# Altium PCB mach_xa_pin_pcb.PcbDoc
Units mil, origin at the board's own origin, x right, y up, seen from the top; angles counter-clockwise.
Board outline 1574.8 x 590.55 mil, 2 copper layers (Top Layer, Bottom Layer); 30 components, 22 nets, 94 pads, 39 vias.
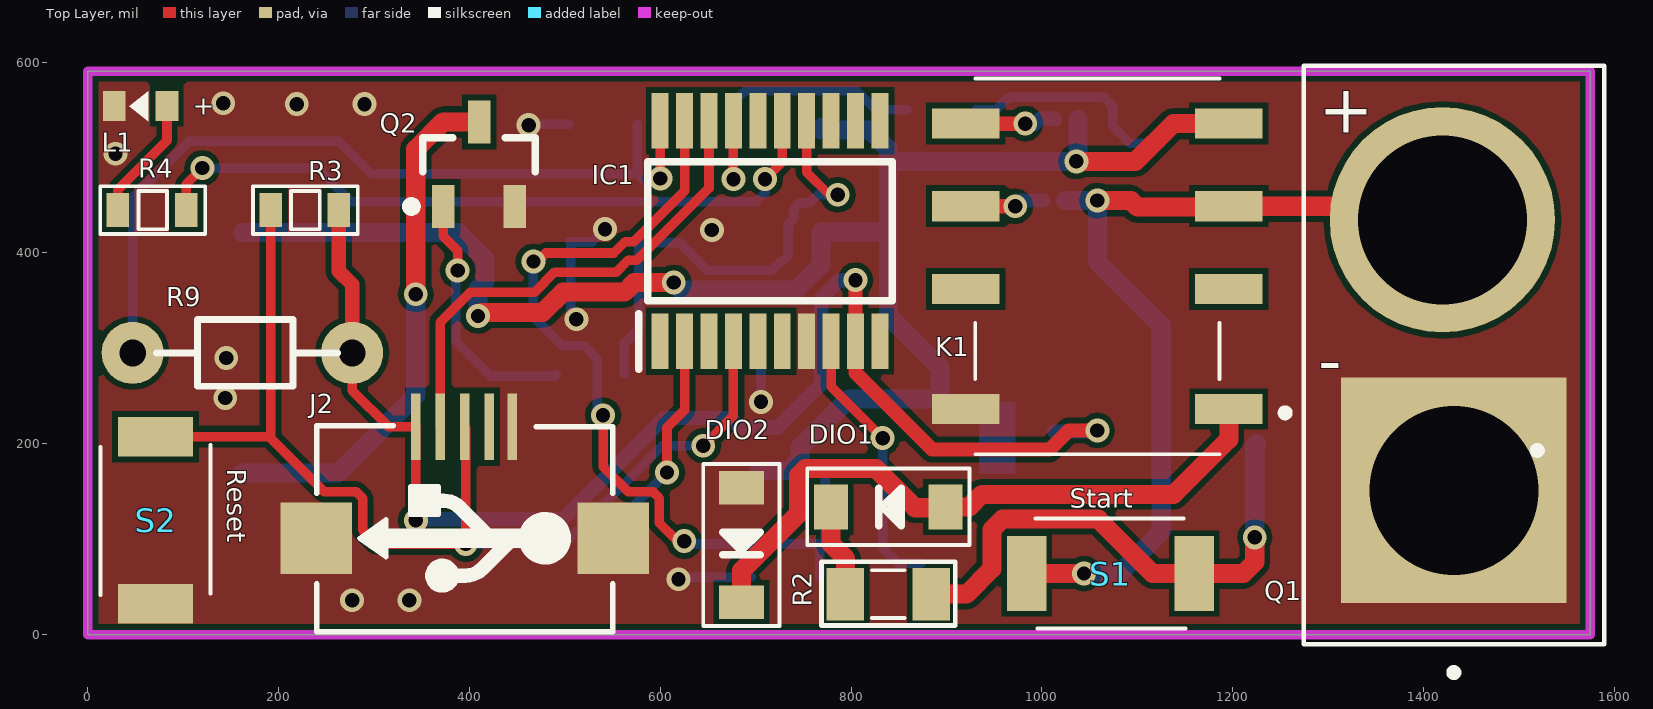
[diagram p0: Top Layer view]
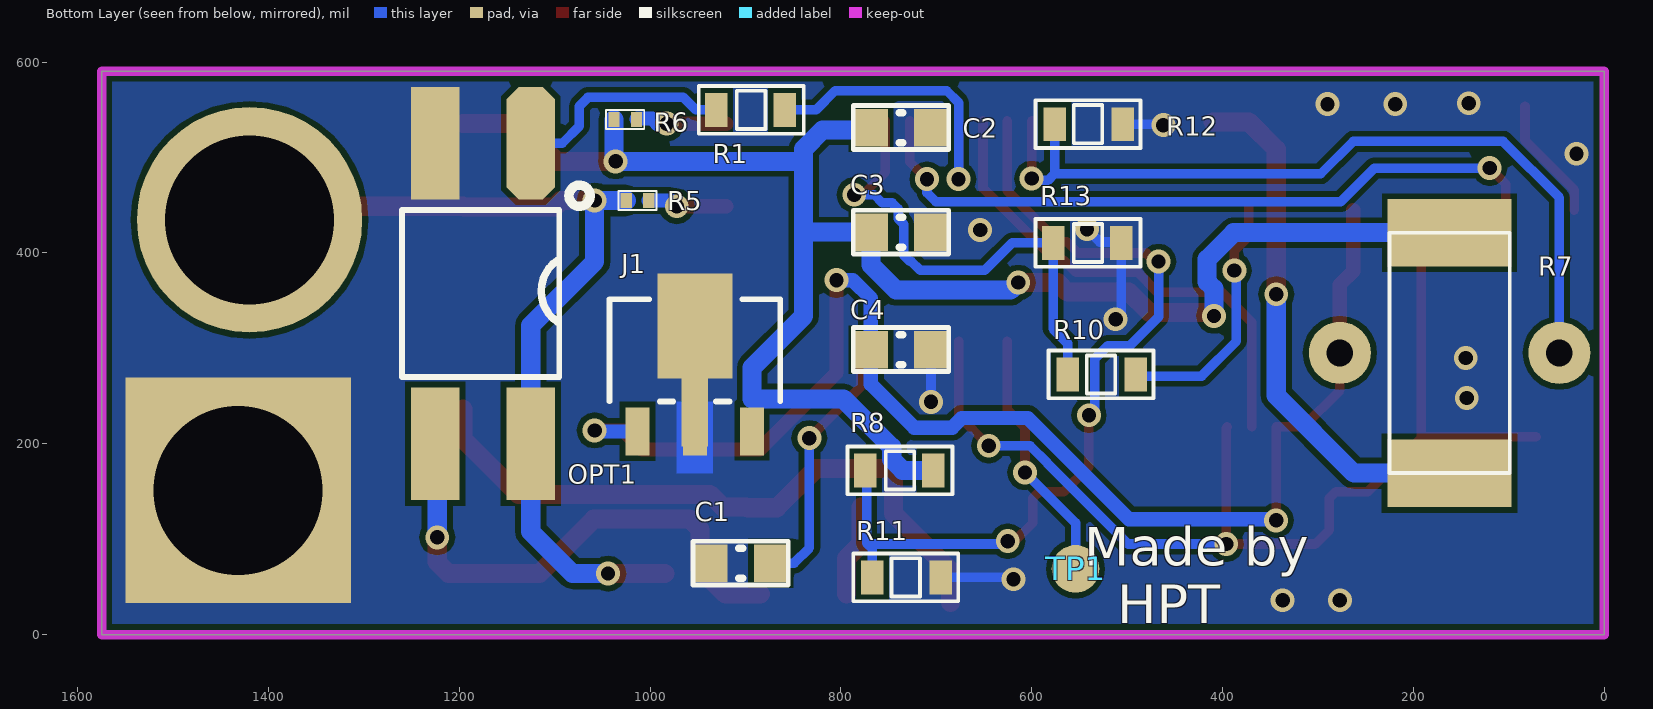
[diagram p1: Bottom Layer view, seen from below]

## Layer stack, top to bottom
Top Solder: solder mask 0.4, Solder Resist, Dk 3.5
Top Layer: signal copper 1.4
Dielectric 1: dielectric 12.6, FR-4, Dk 4.8
Bottom Layer: signal copper 1.4
Bottom Solder: solder mask 0.4, Solder Resist, Dk 3.5

## Board outline
0,0 0,590.55 1574.8,590.55 1574.8,0

## Design rules (kind name [scope] priority, off if disabled: settings)
Clearance [All] p1: gap=6
HoleToHoleClearance [All] p1: gap=6 allowstackedmicrovias=TRUE
MinimumSolderMaskSliver [All] p1: minsoldermaskwidth=6
PlaneConnect [All] p1: planeconnectstyle=Direct reliefexpansion=20 reliefentries=4 reliefconductorwidth=10 reliefairgap=0
PolygonConnect [All] p1: connectstyle=Direct reliefconductorwidth=10 reliefentries=4 polygonreliefangle="90 Angle" airgapwidth=10
RoomDefinition mach_xa_pin_schematic [InComponentClass('mach_xa_pin_schematic')] p1: confinementstyle=ConfineIn formatcopy=TRUE lockcomponents=FALSE outline 2217.7,12.1 2947.7,12.1 2947.7,382.1 2217.7,382.1
RoutingVias [All] p1: holewidth=15 width=25 viastyle="Through Hole" minholewidth=15 minwidth=25 maxholewidth=25 maxwidth=50
SilkToSilkClearance [All] p1: silktosilkclearance=6
SilkToSolderMaskClearance [IsPad] p1: minsilkscreentomaskgap=6 clearancetoexposedcopper=TRUE
SolderMaskExpansion [All] p1: expansion=4
Width [All] p1: maxlimit=50 minlimit=6 preferedwidth=10
25 further rules are at their usual default settings.

## Components (designator, comment, footprint, x,y, rotation, side; value= is the part's Value field where it differs from the comment)
C1 "1uF" CN-SMD-0603 905,75 r0 bottom
C2 "10pF" CN-SMD-0603 737,531.46 r0 bottom
C3 "10pF" CN-SMD-0603 737,421.89 r0 bottom
C4 "10pF" CN-SMD-0603 737,298.77 r0 bottom
DIO1 "Diode SMD" DIO-SMD-123 839,134 r0 top
DIO2 "Diode SMD" DIO-SMD-123 685,94 r90 top
IC1 "STM8S103F3P6BTR" SOP65P640X120-20N 715,423 r90 top
J1 "78L05" SOT89R 953,288 r180 bottom
J2 "USB-5" USB-M1 395,218 r180 top
K1 "G6K-2F-Y-DC12" G6K2FYDC12 1058,386 r90 top
L1 "Led 0603 Green" "LED 0603 GREEN" 55.4,554 r180 top
OPT1 "PC817" "DIP-4 SMD" 1125,515 r270 bottom
Q1 "XT60_YELLOW" AMASS_XT60PB-M 1431.7,293 r90 top
Q2 "AO3400" SOT-23_N 410,493 r90 top
R1 "220R" RES-SMD-0603 894,550 r0 bottom
R2 "0R" RES-SMD-0805 839,42.5 r180 top
R3 "1K" RES-SMD-0603 228,445 r180 top
R4 "220R" RES-SMD-0603 68,445 r180 top
R5 "0R" RES-SMD-0201 1013,455 r180 bottom
R6 "0R" RES-SMD-0201 1026,540 r0 bottom
R7 "181R" RES-SMD-2512 167,295.28 r270 bottom
R8 "10K" RES-SMD-0603 737.99,172.11 r0 bottom
R9 "Res" RES-1/8W-SMALL-2 167,300.28 r180 top
R10 "1K" RES-SMD-0603 527.32,272.68 r180 bottom
R11 "1K" RES-SMD-0603 732,60 r180 bottom
R12 "10K" RES-SMD-0603 540.99,535 r180 bottom
R13 "10K" RES-SMD-0603 541,410.5 r0 bottom
S1 "Start" TS1088R02026 1071.78,64 r180 top
S2 "Reset" TS1088R02026 71,120 r90 top
TP1 "TP" "P-TP 1MM" 554,69 r90 bottom

## Footprints (in the part's own frame and the unit in brackets; to place one, negate y for a bottom-side part, rotate by r counter-clockwise, add the part's x,y. Pads: shape width x height; smd on the part's side, far side on the other; paste and mask are expansions set on the pad)
AMASS_XT60PB-M [mm]
  rect 6x6 hole 4.5: 1(-3.6,0)
  round 6 hole 4.5: 2(3.6,0.305)
  silkscreen extent -8.55,-4 7.7,4, body extent -7.75,-19.65 7.75,0.85, height 6.08
CN-SMD-0603 [mm]
  rect 0.9x1 smd: 1(-0.8,0) 2(0.8,0)
  silkscreen extent -1.27,-0.58 1.27,0.58, body extent -0.8,-0.4 0.8,0.4, height 0.3
DIO-SMD-123 [mm]
  rect 0.9x1.2 smd: 1(1.524,0) 2(-1.524,0)
  silkscreen extent -2.16,-1.02 2.16,1.02, body extent -1.76,-0.8 1.94,0.8, height 1.25
"DIP-4 SMD" [mm]
  oct 3x1.3 smd: 1(0,0)
  rect 3x1.3 smd: 2(0,-2.54) 3(8,-2.54) 4(8,0)
  silkscreen extent 1.11,-3.43 6.22,1.58, body extent -1,-3.56 9,1.02, height 3.75
G6K2FYDC12 [mm]
  rect 0.8x1.8 smd: 1(-3.8,-3.5) 2(-0.6,-3.5) 3(1.6,-3.5) 4(3.8,-3.5) 5(3.8,3.5) 6(1.6,3.5) 7(-0.6,3.5) 8(-3.8,3.5)
  silkscreen extent -5,-5.1 5,3.25, body extent -5,-4.32 5,4.32, height 5.5
"LED 0603 GREEN" [mm]
  rect 0.6x0.8 smd: 1(-0.7,0) 2(0.7,0)
  silkscreen extent -0.2,-0.4 0.3,0.4, body extent -0.8,-0.4 0.8,0.4, height 0.62
"P-TP 1MM" [mil]
  round 50 smd mask+2: 1(0,0)
RES-1/8W-SMALL-2 [mil] "R 1/8W, 2 pin, 200mil"
  round 65 hole 28: 1(-110,5) 2(120,5)
  silkscreen extent -95,-30 95,40, body extent -121,-30 131,41, height 75
RES-SMD-0201 [mm]
  rect 0.3x0.4 smd: 1(-0.3,0) 2(0.3,0)
  silkscreen extent -0.51,-0.25 0.51,0.25, body extent -0.3,-0.15 0.3,0.15, height 0.22
RES-SMD-0603 [mm]
  rect 0.6x0.9 smd: 1(-0.889,0) 2(0.927,0)
  silkscreen extent -1.4,-0.64 1.4,0.64, body extent -0.8,-0.4 0.8,0.4, height 0.43
RES-SMD-0805 [mil]
  rect 39.37x55 smd: 1(-45,0) 2(45,0)
  silkscreen extent -70,-34 70,33, body extent -39,-25 39,25, height 31
RES-SMD-2512 [mm] "Chip Capacitor, Body 3.2x2.5mm, IPC Medium Density"
  rect 1.8x3.3 smd: 1(-3.2,0.127) 2(3.2,0.127)
  silkscreen extent -3.2,-1.47 3.2,1.73, body extent -3.2,-1.47 3.2,1.73, height 0.6
SOP65P640X120-20N [mm]
  rect 1.475x0.45 smd: 1(-2.938,2.925) 2(-2.938,2.275) 3(-2.938,1.625) 4(-2.938,0.975) 5(-2.938,0.325) 6(-2.938,-0.325) 7(-2.938,-0.975) 8(-2.938,-1.625) 9(-2.938,-2.275) 10(-2.938,-2.925) 11(2.938,-2.925) 12(2.938,-2.275) 13(2.938,-1.625) 14(2.938,-0.975) 15(2.938,-0.325) 16(2.938,0.325) 17(2.938,0.975) 18(2.938,1.625) 19(2.938,2.275) 20(2.938,2.925)
  silkscreen extent -3.67,-3.25 1.85,3.5, body extent -3.2,-3.25 3.2,3.25, height 1.2
SOT89R [mm]
  rect 0.635x1.27 smd: P$1(1.524,-1.905) P$2(0,-1.905) P$3(-1.524,-1.905)
  rect 0.7x1.8 smd paste-2 mask+0: P$2(0,-1.4)
  rect 2x2.8 smd: P$2(0,0.9)
  Top Layer region: 0.476,-3.016 -0.476,-3.016 -0.476,-1.111 0.476,-1.111
  silkscreen extent -2.27,-1.11 2.27,1.61, body extent -2.25,-2.43 2.25,1.67, height 1.6
SOT-23_N [mm] "SOT23, 3-Leads, Body 2.9x1.3mm, Pitch 0.95mm, Lead Span 2.3mm, IPC Medium Density"
  rect 1.15x0.6 smd: 1(-1.125,0.95) 2(-1.125,-0.95) 3(1.125,0)
  silkscreen extent -1.25,-1.5 0.7,1.92, body extent -0.7,-1.5 0.7,1.5, height 1.11
TS1088R02026 [mm]
  rect 1.05x2 smd: 1(-2.225,0) 2(2.225,0)
  silkscreen extent -2,-1.47 2,1.47, body extent -2.65,-1.47 2.65,1.47, height 2.3
USB-M1 [mil]
  rect 10x70 smd: 1(51.18,0) 2(25.59,0) 3(0,0) 4(-25.59,0) 5(-50,0)
  rect 74.8x74.8 smd: 5(-155.51,116.84) 5(155.51,116.84)
  silkscreen extent -155,-1 155,215, body extent -157,5 158,218, height 107

## Part data
C1 C2 C3 C4: library part CN
DIO1 DIO2: "Default Diode"
IC1: "Integrated Circuit"
J1: "IC REG LINEAR 5V 100MA SOT89-3"
K1: "Relay or Contactor"
OPT1: "OptoAcoplador 4 terminais"
Q1: "Power connector; 65A; PIN: 2; Colour: yellow"
Q2: library part IRLML2402, "HEXFET Power MOSFET"
R1 R2 R3 R4 R5 R6 R7 R8 R10 R11 R12 R13: library part Res-SMD, "Resistor"
S1 S2: library part TS-1088R-02026, "Switch"
TP1: library part P-TESTPOINT

## Via types
v1: diameter 25, hole 15, Top Layer to Bottom Layer, tented both sides, 39 vias

## Nets (pads, with @x,y where several pads share a name; then routed paths per layer and width w, separated by ;. In a path a pad name is that pad's centre, name@x,y a point inside that pad or via, vN(x,y) a via of type N, cw(c..) or ccw(c..) an arc to the next point about the centre after c; other vN are vias at no path point)
5V: C4.2 IC1.9 J1.P$3 J2.1 R3.1 R9.1 | length 1439.1
  Top Layer w10: R9.1 277,256 315,218 J2.1 v1(343.82,119.82)
  Top Layer w15: R3.1 263,381 277,367 R9.1 ; v1(804.57,371.57) IC1.9 804.57,274.43 885,194 1008,194 1028,214 v1(1058,214)
  Bottom Layer w15: v1(343.82,119.82) 345,121 498,121 604,227 673.23,227 683.23,217 723,217 768.5,262.5 C4.2 768.5,352.5 787.57,371.57 v1(804.57,371.57) ; J1.P$3 1057,213 v1(1058,214)
GND: C1.2 C2.1 C3.1 C4.1 DIO2.1 IC1.7 J1.P$2 J2.5 K1.8 L1.2 OPT1.2 Q1.1 Q2.2 R11.2 R12.2 R13.1 S2.1 | length 317.4
  Top Layer w10: v1@218,557 v1(219,556) ; v1(512,330.5) v1@512,331 ; v1@619,51 v1(619,58) ; v1(654,424) v1@654,430
  Bottom Layer w10: v1(144,248) v1@144,249 ; v1(462,534) 463,535 R12.2 ; v1(512,330.5) 506,336.5 R13.1 505,411.5 528.5,411.5 v1(542,425) ; v1(619,58) 621,60 R11.2 ; v1(705.5,244) C4.1
  other v1: 277,36 337,36 145,290 29,504 290,556 142,557
MOSFET: IC1.14 R10.1 R13.2 | length 518.7
  Top Layer w10: IC1.14 753.39,484.61 777,461 v1(786,461)
  Bottom Layer w10: R10.1 562.32,305.32 577.49,320.49 R13.2 620.5,410.5 649,382 717,382 726.2,391.2 727.78,391.2 734.22,397.64 734.22,430.22 739.78,435.78 739.78,446.13 746.22,452.57 756.57,452.57 765,461 v1(786,461)
NetC1_1: C1.1 IC1.8 | length 285.8
  Top Layer w10: IC1.8 778.98,260.02 v1(833,206)
  Bottom Layer w10: v1(833,206) 833,91 849,75 C1.1
NetDIO1_1: DIO1.1 DIO2.2 K1.1 | length 689.9
  Top Layer w20: DIO2.2 685,67 745,127 745,167 752,174 826,174 867,133 898,133 DIO1.1 924,134 937,147 1138,147 1195.8,204.8 K1.1
NetDIO1_2: DIO1.2 R2.2 | length 97.7
  Top Layer w20: DIO1.2 779,95 794,80 R2.2
NetIC1_2: IC1.2 TP1.1 | length 267.9
  Top Layer w10: v1(607,170) 607,217 625.43,235.43 IC1.2
  Bottom Layer w10: TP1.1 554,117 v1(607,170)
NetIC1_15: IC1.15 R4.1 | length 742.2
  Top Layer w10: R4.1 103,472 v1(120,489) ; v1(709.69,477.39) 727.8,495.49 IC1.15
  Bottom Layer w10: v1(120,489) 240.77,489 275.89,453.89 700.48,453.89 709.69,463.1 v1(709.69,477.39)
NetK1_5: K1.5 R6.1 | length 96.6
  Top Layer w15: K1.5 v1(982.39,535.61)
  Bottom Layer w15: v1(982.39,535.61) 992.61,535.61 998,541 1013.19,541 R6.1
NetK1_6: K1.6 R5.2 | length 83.5
  Top Layer w15: K1.6 v1(971.99,448.99)
  Bottom Layer w15: v1(971.99,448.99) 978,455 R5.2
NetL1_1: L1.1 R4.2 | length 130.3
  Top Layer w10: R4.2 31.51,466.51 82.96,517.96 L1.1
NetOPT1_1: OPT1.1 R1.2 | length 232.1
  Bottom Layer w10: R1.2 952,550 965,563 1065,563 1074,554 1074,533 1092,515 OPT1.1
NetOPT1_3: OPT1.3 R2.1 S1.1 | length 549
  Top Layer w20: R2.1 921.01,42.5 947.51,69 947.51,110 958.51,121 1059,121 1116,64 S1.1 1211,64 1223,76 v1(1223,102)
  Bottom Layer w20: v1(1223,102) 1223,198.04 OPT1.3
NetQ2_1: Q2.1 R10.2 | length 269.4
  Top Layer w10: Q2.1 372.6,417.4 387.6,402.4 v1(387.6,381.6)
  Bottom Layer w10: v1(387.6,381.6) 385.5,379.5 385.5,307.5 422,271 489.14,271 R10.2
NetQ2_3: Q2.3 R7.2 | length 551.6
  Top Layer w20: v1(343.71,356.71) 343.71,508.71 372.29,537.29 Q2.3
  Bottom Layer w20: R7.2 262.29,169.29 343.71,250.71 v1(343.71,356.71)
NRST: IC1.4 J2.3 R3.2 S2.2 | length 1166.9
  Top Layer w10: S2.2 190,207.6 ; R3.2 191.51,209.11 190,207.6 ; J2.3 396,217 v1(396,95) 302.6,95 287.89,109.71 287.89,143.12 281.45,149.56 248.04,149.56 190,207.6 ; v1(645,198) 676.61,229.61 IC1.4
  Bottom Layer w10: v1(396,95) 499,95 583.5,179.5 583.5,179.73 601.77,198 v1(645,198)
RELAY_CONTROL: IC1.17 R1.1 | length 337.3
  Top Layer w10: v1(676.61,477.39) IC1.17
  Bottom Layer w10: v1(676.61,477.39) 676.61,557.61 689,570 806,570 826,550 R1.1
SWIM: IC1.18 J2.2 | length 520.1
  Top Layer w10: J2.2 369.41,327.64 400.55,358.79 468.02,358.79 489.23,380 553.86,380 566.36,392.5 575.5,392.5 651.02,468.02 IC1.18
TEM: IC1.20 R9.2 R12.1 | length 871.9
  Top Layer w10: IC1.20 599.84,478.16 v1(600,478)
  Bottom Layer w10: R9.2 47,458 106,517 263,517 297,483 576,483 ; R12.1 576,483 ; v1(600,478) 600,476 583,476 576,483
V_BAT: K1.3 OPT1.4 Q1.2 R5.1 S1.2 | length 937.9
  Top Layer w20: S1.2 v1(1044,64) ; v1(1058,455) 1093,455 1100,448 1194.8,448 K1.3 1405.43,448.99 Q1.2
  Bottom Layer w20: R5.1 v1(1058,455) 1058,391 1125,324 OPT1.4 1125,108 1081,64 v1(1044,64)
V_IN: C2.2 C3.2 J1.P$1 K1.4 R6.2 R7.1 R8.1 | length 1833.2
  Top Layer w20: v1(409,334) 412.79,337.79 476.72,337.79 497.93,359 562.56,359 572.56,369 v1(614,369) ; v1(1036,496) 1098,496 1137.61,535.61 K1.4
  Bottom Layer w20: R7.1 388.24,421.26 416.1,393.4 416.1,369.79 409,362.69 v1(409,334) ; v1(614,369) 622,361 742,361 768.5,387.5 C3.2 839,421.89 ; R8.1 735.11,172.11 746.66,183.66 746.66,196.45 797.21,247 893,247 893,280 839,334 839,421.89 ; C2.2 768.5,529 819,529 839,509 839,496 ; R6.2 1037.81,497.81 v1(1036,496) 839,496 ; 839,421.89 839,496
VOLTAGE: IC1.19 R8.2 R11.1 | length 917.4
  Top Layer w10: v1(467,391) 471,391 480,400 551.23,400 563.23,412 572.37,412 625.43,465.06 IC1.19 ; v1(540,230) 540,176 566.44,149.56 592.47,149.56 598.91,143.12 598.91,117.09 618,98 v1(625,98)
  Bottom Layer w10: v1(467,391) 467,333 497,303 520,303 534,289 534,236 v1(540,230) ; v1(625,98) 628,95 771.98,95 ; R11.1 767,90.02 771.98,95 ; R8.2 772.98,170.62 772.98,96 771.98,95
pads on no net: IC1.1 IC1.3 IC1.5 IC1.6 IC1.10 IC1.11 IC1.12 IC1.13 IC1.16 J2.4 K1.2 K1.7

## Polygon pours and split planes (outlines as drawn)
GND on Top Layer "Top Layer-No Net" (solid, pour order 10): 0,590.55 1574.8,590.55 1574.8,0 0,0
GND on Bottom Layer "Top Layer-No Net" (solid, pour order 12): 0,590.55 1574.8,590.55 1574.8,0 0,0

## Keep-outs
Keep-Out Layer:
  the board outline again, w10

## Silkscreen, mask and mechanical layers (free items; w line width, h text height)
Top Overlay:
  text "+" at 110,545 h20
  text "+" at 1290,526 h50
  text "-" at 1289.7,263 h50
Bottom Overlay:
  text "Made by  /   HPT" at 545,12 h40